# Altium PCB exchange_pcbV2.PcbDoc
Units mil, origin at the board's own origin, x right, y up, seen from the top; angles counter-clockwise.
Board outline 1377.95 x 895 mil, 2 copper layers (Top Layer, Bottom Layer); 3 components, 7 nets, 25 pads, 0 vias.
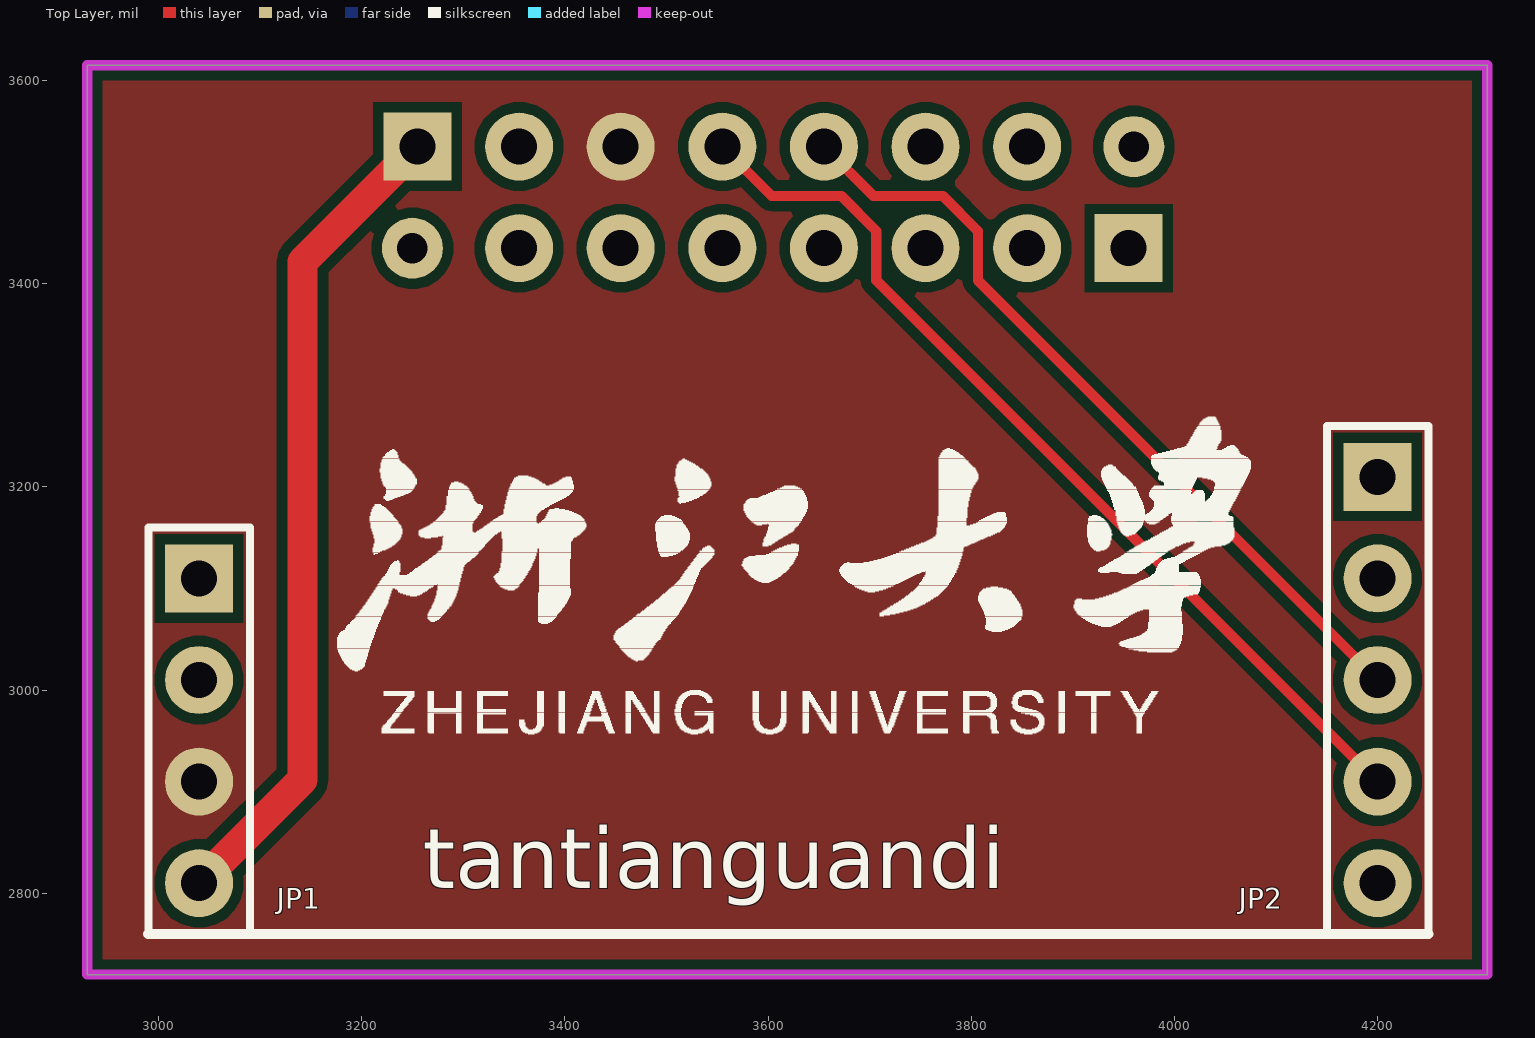
[diagram p0: Top Layer view]
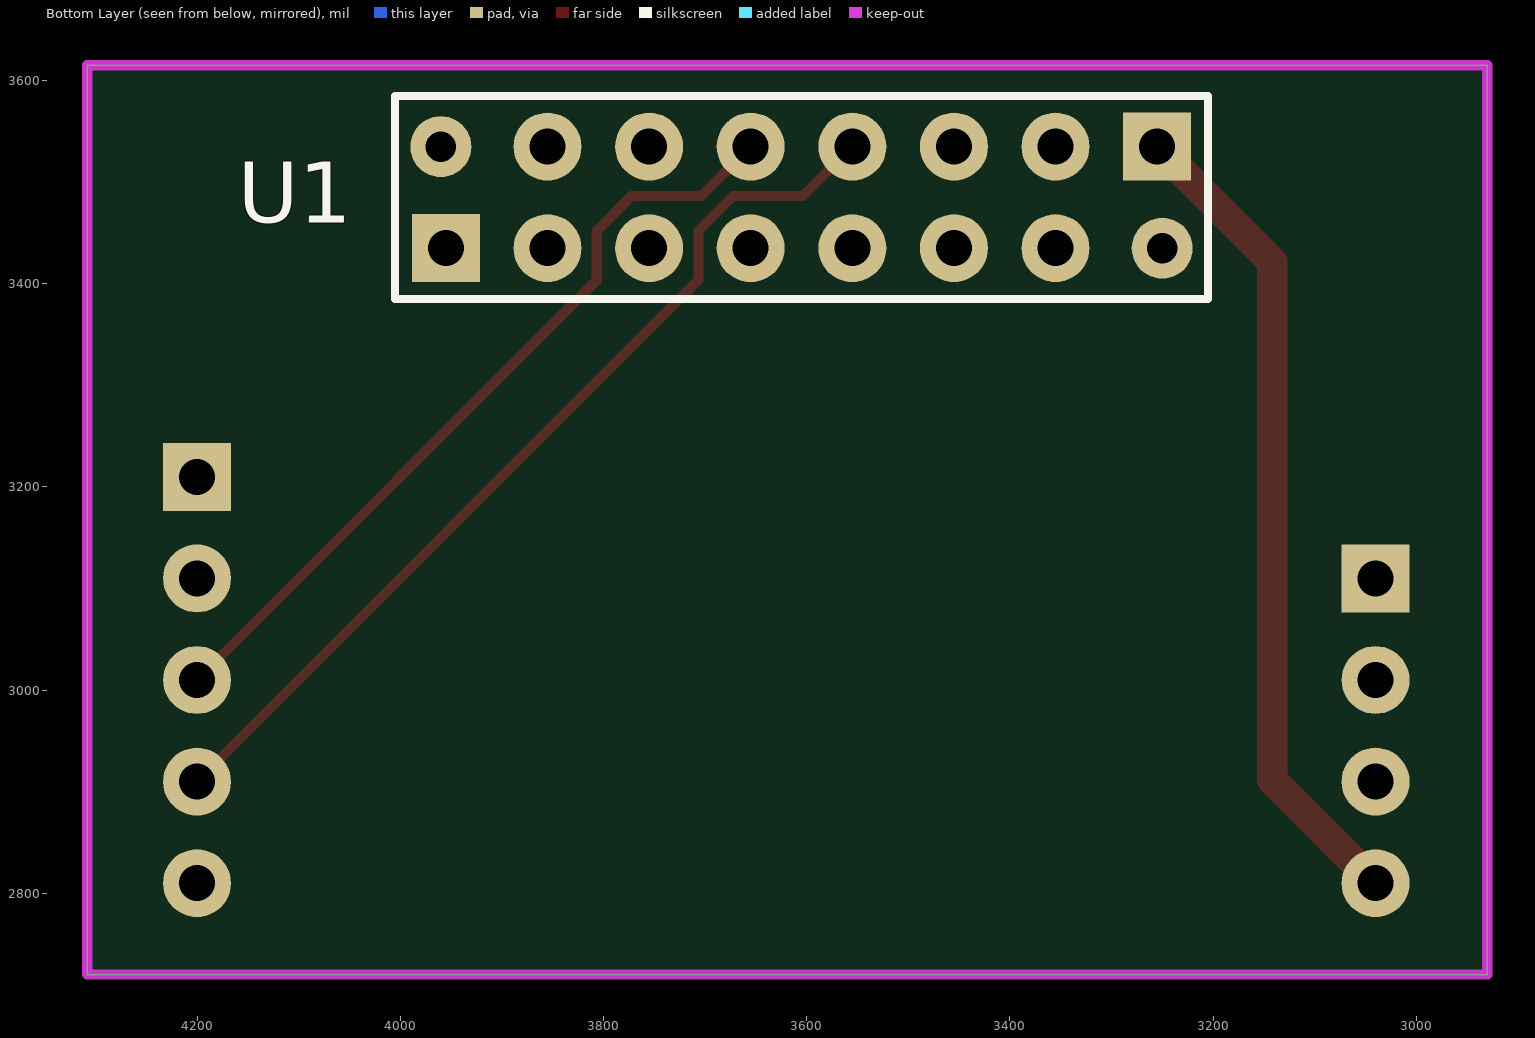
[diagram p1: Bottom Layer view, seen from below]

## Layer stack, top to bottom
Top Solder: solder mask 0.4, Solder Resist, Dk 3.5
Top Layer: signal copper 1.4
Dielectric 1: dielectric 12.6, FR-4, Dk 4.8
Bottom Layer: signal copper 1.4
Bottom Solder: solder mask 0.4, Solder Resist, Dk 3.5

## Board outline
2930,2720 4307.95,2720 4307.95,3615 2930,3615

## Design rules (kind name [scope] priority, off if disabled: settings)
Clearance [All] p1: gap=10 ignorepadtopadclearanceinfootprint=FALSE except(0: Arc-Hole Track-Hole SMDPad-Hole THPad-Hole Via-Hole Fill-Hole Poly-Hole Region-Hole Text-Hole)
PolygonConnect [All] p1: connectstyle=Direct reliefconductorwidth=10 reliefentries=4 polygonreliefangle="90 Angle" airgapwidth=10
RoutingVias [All] p1: holewidth=28 width=50 viastyle="Through Hole" minholewidth=28 minwidth=50 maxholewidth=28 maxwidth=50
SolderMaskExpansion [All] p1: expansion=4 istentingtop=FALSE
Width [All] p1: maxlimit=50 minlimit=10 preferedwidth=10
30 further rules are at their usual default settings.

## Classes and differential pairs
component class Sheet1: JP1 U1

## Components (designator, comment, footprint, x,y, rotation, side; value= is the part's Value field where it differs from the comment)
JP1 "HDR-1X4" HDR2.54-M-LI-4P 3040,2960 r270 top
JP2 "HDR-1X5" HDR2.54-M-LI-5P 4200,3010 r270 top
U1 "Header8X2" header8X2 3253.5,3535 r180 bottom

## Footprints (in the part's own frame and the unit in brackets; to place one, negate y for a bottom-side part, rotate by r counter-clockwise, add the part's x,y. Pads: shape width x height; smd on the part's side, far side on the other; paste and mask are expansions set on the pad)
HDR2.54-M-LI-4P [mm] "排母，4脚  淘宝ID:黄晶宝石   店铺网址:https://shop463601444.taobao.com"
  rect 1.7x1.7 hole 0.9: 1(-3.81,0)
  round 1.7 hole 0.9: 2(-1.27,0) 3(1.27,0) 4(3.81,0)
  silkscreen extent -5.08,-1.27 5.08,1.27, body extent -5.08,-1.27 5.08,1.27, height 8.5
HDR2.54-M-LI-5P [mm] "排母，5脚   淘宝ID:黄晶宝石   店铺网址:https://shop463601444.taobao.com"
  rect 1.7x1.7 hole 0.9: 1(-5.08,0)
  round 1.7 hole 0.9: 2(-2.54,0) 3(0,0) 4(2.54,0) 5(5.08,0)
  silkscreen extent -6.35,-1.27 6.35,1.27, body extent -6.35,-1.27 6.35,1.27, height 8.5
header8X2 [mm]
  rect 1.7x1.7 hole 0.9: 1(-0.038,0) 16(-17.818,-2.54)
  round 1.7 hole 0.9: 2(-2.578,0) 3(-5.118,0) 4(-7.658,0) 5(-10.198,0) 6(-12.738,0) 7(-15.278,0) 10(-2.578,-2.54) 11(-5.118,-2.54) 12(-7.658,-2.54) 13(-10.198,-2.54) 14(-12.738,-2.54) 15(-15.278,-2.54)
  round 1.524 hole 0.762: 8(-17.945,0) 9(0.089,-2.54)
  silkscreen extent -19.09,-3.81 1.23,1.27, body extent -19.09,-3.81 1.23,1.27, height 8.5

## Part data
JP1: library part "Header 4", "4P接插件", BOM名称=4P接插件, 学习资源=https://shop463601444.taobao.com, 版权归属="封装库来自淘宝 ID：黄晶宝石"
JP2: library part "Header 5", "5P接插件", BOM名称=5P接插件, 学习资源=https://shop463601444.taobao.com, 版权归属="封装库来自淘宝 ID：黄晶宝石"

## Nets (pads, with @x,y where several pads share a name; then routed paths per layer and width w, separated by ;. In a path a pad name is that pad's centre, name@x,y a point inside that pad or via, vN(x,y) a via of type N, cw(c..) or ccw(c..) an arc to the next point about the centre after c; other vN are vias at no path point)
GND: JP1.3 U1.3
HD: JP2.1
PWM: JP1.1
Rx: JP2.4 U1.4 | length 932.3
  Top Layer w10: U1.4 3603.46,3486.54 3672,3486.54 3706.54,3452 3706.54,3403.46 JP2.4
Tx: JP2.3 U1.5 | length 790.9
  Top Layer w10: U1.5 3703.46,3486.54 3772,3486.54 3806.54,3452 3806.54,3403.46 JP2.3
Vin: JP1.4 U1.1 | length 814.1
  Top Layer w30: JP1.4 3141.8,2911.8 3141.8,3421.8 U1.1
Vo: JP2.5
pads on no net: JP1.2 JP2.2 U1.2 U1.6 U1.7 U1.8 U1.9 U1.10 U1.11 U1.12 U1.13 U1.14 U1.15 U1.16

## Polygon pours and split planes (outlines as drawn)
GND on Top Layer "GND_L01_P000" (solid, remove dead copper, pour order 0): 2845,3690 4405,3690 4405,2605 2850,2605 2845,2610

## Keep-outs
Keep-Out Layer:
  the board outline again, w10

## Silkscreen, mask and mechanical layers (free items; w line width, h text height)
Top Overlay:
  drawing of 2685 lines, arcs and shapes, not listed
  text "tantianguandi" at 3260,2804.99 h60